# Altium PCB Step_Motor_Driver.PcbDoc
Units mil, origin at the board's own origin, x right, y up, seen from the top; angles counter-clockwise.
Board outline 3200 x 2100 mil, 2 copper layers (Top Layer, Bottom Layer); 30 components, 48 nets, 149 pads, 34 vias.
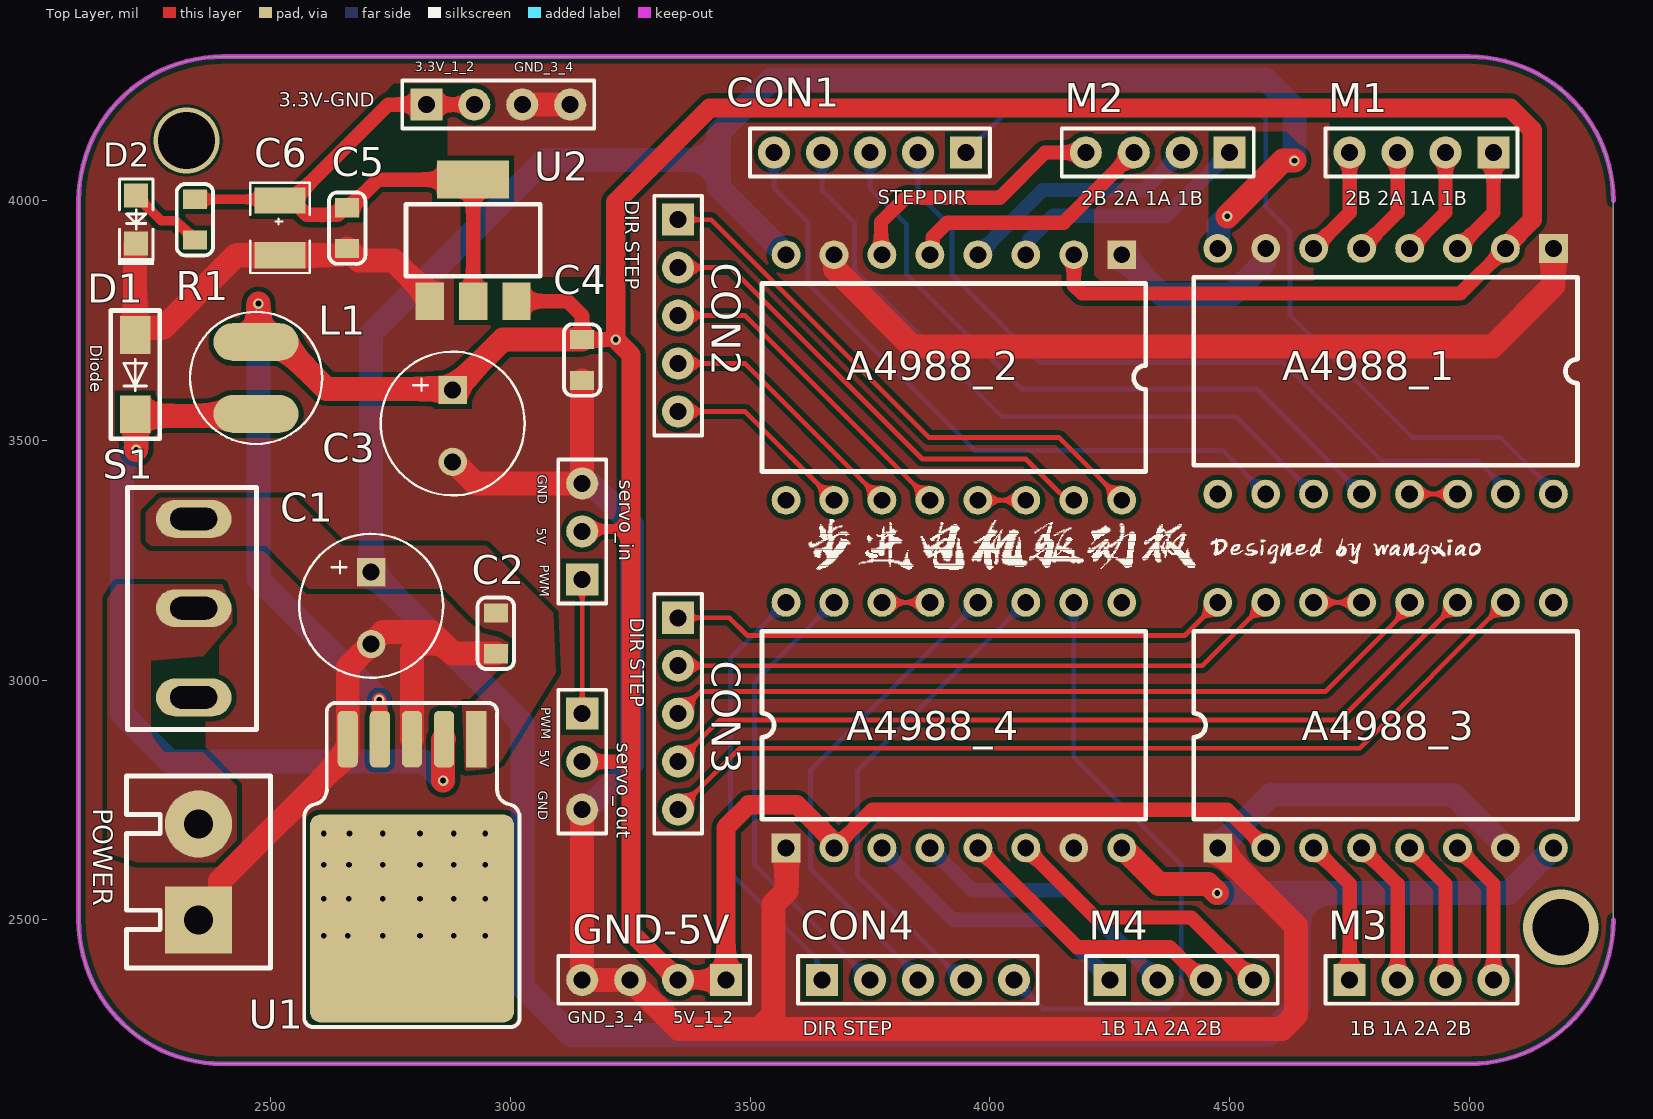
[diagram p0: Top Layer view]
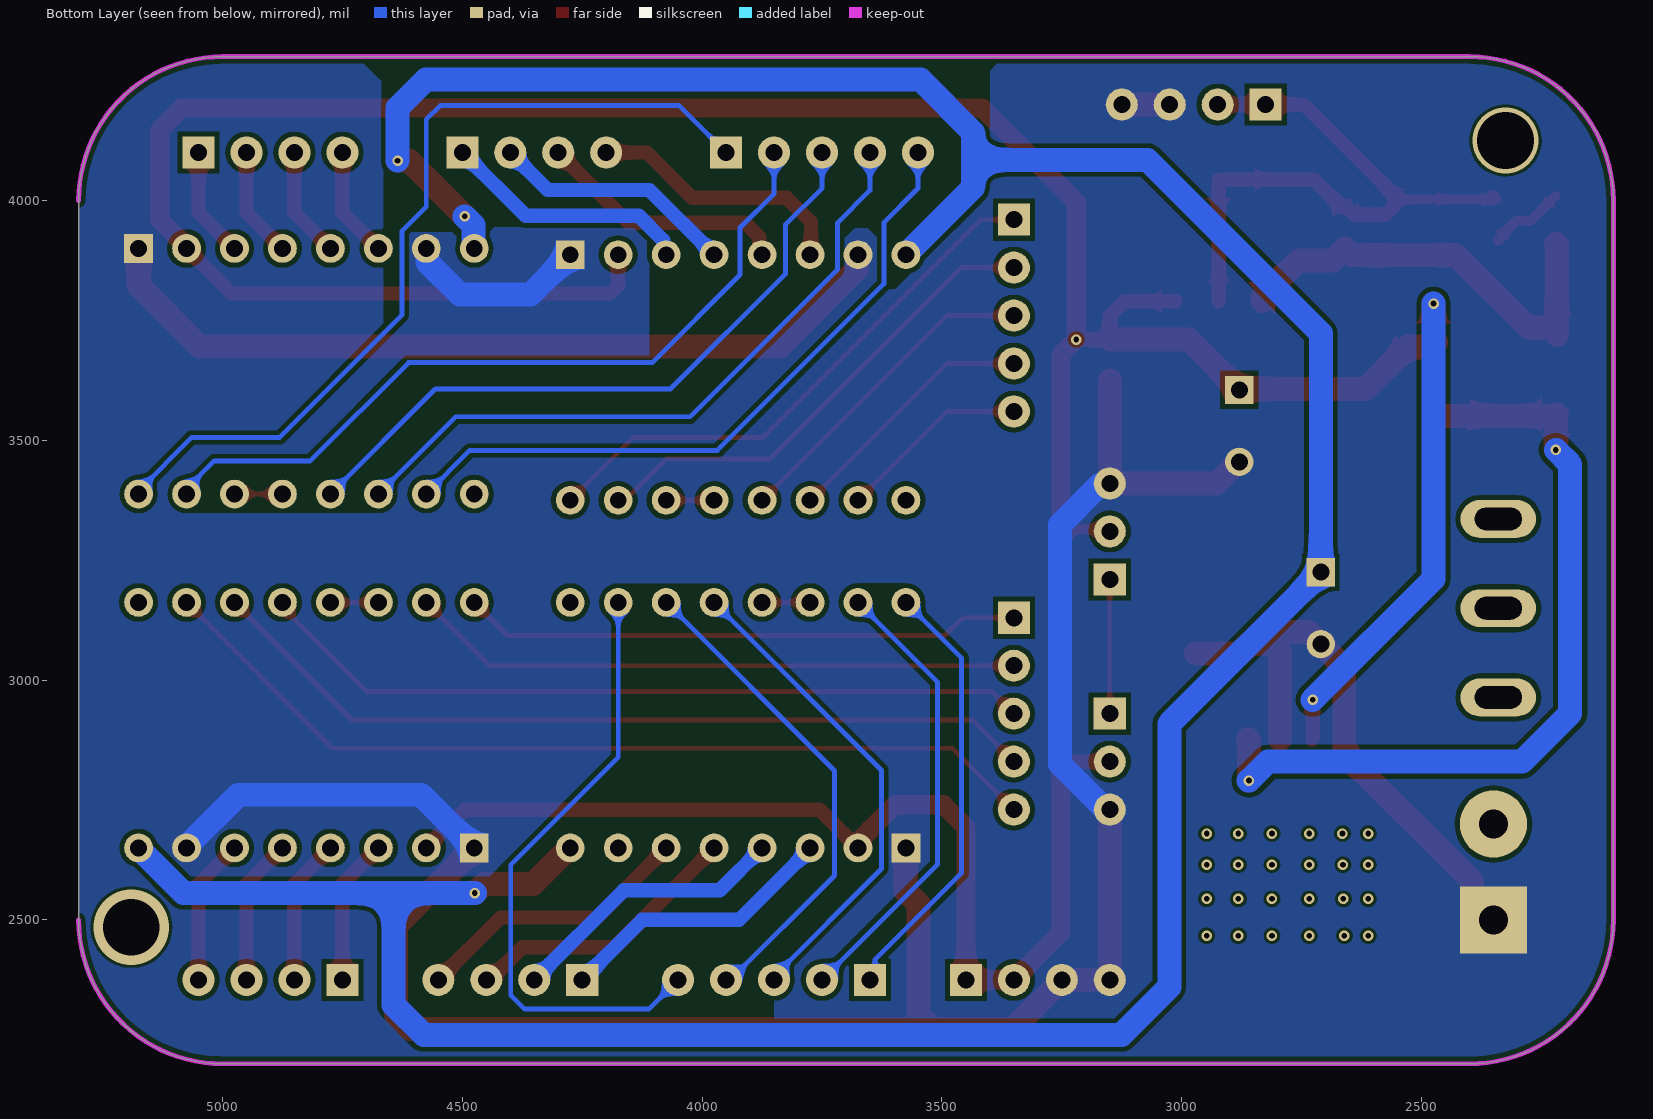
[diagram p1: Bottom Layer view, seen from below]

## Layer stack, top to bottom
Top Solder: solder mask 0.4, Solder Resist, Dk 3.5
Top Layer: signal copper 1.4
Dielectric 1: dielectric 12.6, FR-4, Dk 4.8
Bottom Layer: signal copper 1.4
Bottom Solder: solder mask 0.4, Solder Resist, Dk 3.5

## Board outline
2100,2500 2100,4000 cw(c2400,4000) 2400,4300 5000,4300 cw(c5000,4000) 5300,4000 5300,2500 cw(c5000,2500) 5000,2200 2400,2200 cw(c2400,2500)

## Design rules (kind name [scope] priority, off if disabled: settings)
Clearance [All] p1: gap=6 ignorepadtopadclearanceinfootprint=TRUE except(10: Arc-Fill Arc-Poly Arc-Region Track-Fill Track-Poly Track-Region SMDPad-Fill SMDPad-Poly SMDPad-Region THPad-Fill THPad-Poly THPad-Region Fill-Fill Fill-Poly Fill-Region Poly-Poly Poly-Region Region-Region)
PlaneClearance [All] p1: clearance=8
PolygonConnect [All] p1: connectstyle=Direct reliefconductorwidth=10 reliefentries=4 polygonreliefangle="90 Angle" airgapwidth=10
RoutingVias [All] p1: holewidth=12 width=22 viastyle="Through Hole" minholewidth=12 minwidth=22 maxholewidth=12 maxwidth=22
SilkToSilkClearance [All] p1: silktosilkclearance=6
SilkToSolderMaskClearance [IsPad] p1: minsilkscreentomaskgap=2 clearancetoexposedcopper=TRUE
SolderMaskExpansion [All] p1: expansion=4 istentingtop=FALSE
Width PWR [InNetClass('PWR')] p1: maxlimit=60 minlimit=20 preferedwidth=20
Width [All] p2: maxlimit=20 minlimit=10 preferedwidth=10
27 further rules are at their usual default settings.

## Classes and differential pairs
net class PWR: 1A_1 1A_2 1A_3 1A_4 1B_1 1B_2 1B_3 1B_4 2A_1 2A_2 2A_3 2A_4 2B_1 2B_2 2B_3 2B_4 3.3V 5V 12V GND NetD1_2 NetD2_1

## Components (designator, comment, footprint, x,y, rotation, side; value= is the part's Value field where it differs from the comment)
3.3V-GND "3.3V_GND" HDR2.54-LI-4P 2975,4200 r0 top (schematic designator P3)
A4988_1 "A4988_1" A4988 5175,3900 r270 top (schematic designator U3)
A4988_2 "A4988_2" A4988 4275,3887 r270 top (schematic designator U4)
A4988_3 "A4988_3" A4988 4475,2650 r90 top (schematic designator U5)
A4988_4 "A4988_4" A4988 3575,2650 r90 top (schematic designator U6)
C1 "220uF/25V" "CAP POL [25V]" 2710,3150 r270 top
C2 "Cap" 0805C 2970,3140 r270 top
C3 "220uF/25V" "CAP POL [25V]" 2880,3530 r270 top
C4 "Cap" 0805C 3150,3710 r270 top
C5 "Cap" 0805C 2660,3900 r90 top
C6 "Cap Pol(22uF)" CAP[1210] 2521,3942.91 r270 top
CON1 "CON1" HDR2.54-LI-5P 3750,4100 r180 top (schematic designator P7)
CON2 "CON2" HDR2.54-LI-5P 3350,3760 r270 top (schematic designator P9)
CON3 "CON3" HDR2.54-LI-5P 3350,2930 r270 top (schematic designator P11)
CON4 "CON4" HDR2.54-LI-5P 3850,2375 r0 top (schematic designator P13)
D1 "1N5822" SS34_3D 2218,3637 r270 top
D2 "LED_BLUE" 0805LED1 2220,3960 r270 top
GND-5V "5V_GND" HDR2.54-LI-4P 3300,2375 r180 top (schematic designator P2)
L1 "Inductor" Inductor_T10uH 2470,3630 r90 top
M1 "M1" HDR2.54-LI-4P 4900,4100 r180 top (schematic designator P6)
M2 "M2" HDR2.54-LI-4P 4350,4100 r180 top (schematic designator P8)
M3 "M3" HDR2.54-LI-4P 4900,2375 r0 top (schematic designator P10)
M4 "M4" HDR2.54-LI-4P 4400,2375 r0 top (schematic designator P12)
POWER "power" 电源端子 2350,2605 r90 top (schematic designator P1)
R1 "Res2" 0805R 2342.5,4002.5 r270 top
S1 "SW-SPDT" SW-TO3 2340,3150 r0 top
servo_in "servo" HDR2.54-LI-3P 3150,3310 r90 top (schematic designator P4)
servo_out "servo" HDR2.54-LI-3P 3150,2830 r270 top (schematic designator P5)
U1 "LM2596-5.0" TO-263-5 2795,2690 r180 top
U2 "AMS1117-3.3" SOT-223 2920,3920 r0 top

## Footprints (in the part's own frame and the unit in brackets; to place one, negate y for a bottom-side part, rotate by r counter-clockwise, add the part's x,y. Pads: shape width x height; smd on the part's side, far side on the other; paste and mask are expansions set on the pad)
0805C [mil]
  rect 40x50 smd: 1(0,0) 2(85,0)
  silkscreen extent -32,-38 117,38, body extent 3,-25 82,25, height 30
0805LED1 [mil]
  rect 50x50 smd: 1(-50,0) 2(50,0)
  silkscreen extent -85,-37 94,37, body extent -37,-24 43,25, height 43
0805R [mil]
  rect 40x50 smd: 1(0,0) 2(85,0)
  silkscreen extent -32,-38 117,38, body extent 3,-25 82,25, height 30
A4988 [mil]
  rect 60x60 hole 35: 1(0,0)
  round 60 hole 35: 2(0,-100) 3(0,-200) 4(0,-300) 5(0,-400) 6(0,-500) 7(0,-600) 8(0,-700) 9(512,-700) 10(512,-600) 11(512,-500) 12(512,-400) 13(512,-300) 14(512,-200) 15(512,-100) 16(512,0)
  silkscreen extent 60,-750 452,50
"CAP POL [25V]" [mm]
  rect 1.5x1.5 hole 0.9: 1(-1.905,0)
  round 1.5 hole 0.9: 2(1.905,0)
  silkscreen extent -3.94,-3.81 3.68,3.81, body extent -4,-4 4,4, height 12
CAP[1210] [mm]
  rect 1.402x2.7 smd: 1(-1.45,-0.025) 2(1.45,-0.025)
  silkscreen extent -2.39,-1.6 2.39,1.55
HDR2.54-LI-3P [mm] "排针，3脚"
  rect 1.7x1.7 hole 0.9: 1(-2.54,0)
  round 1.7 hole 0.9: 2(0,0) 3(2.54,0)
  silkscreen extent -3.81,-1.27 3.81,1.27, body extent -3.81,-1.27 3.81,1.27, height 8.5
HDR2.54-LI-4P [mm] "排针，4脚"
  rect 1.7x1.7 hole 0.9: 1(-3.81,0)
  round 1.7 hole 0.9: 2(-1.27,0) 3(1.27,0) 4(3.81,0)
  silkscreen extent -5.08,-1.27 5.08,1.27, body extent -5.08,-1.27 5.08,1.27, height 8.5
HDR2.54-LI-5P [mm] "排针，5脚"
  rect 1.7x1.7 hole 0.9: 1(-5.08,0)
  round 1.7 hole 0.9: 2(-2.54,0) 3(0,0) 4(2.54,0) 5(5.08,0)
  silkscreen extent -6.35,-1.27 6.35,1.27, body extent -6.35,-1.27 6.35,1.27, height 8.5
Inductor_T10uH [mm]
  oval 2x4.5 smd: 1(-1.905,0) 2(1.905,0)
  silkscreen extent -3.5,-3.5 3.5,3.5, body extent -3.5,-3.5 3.5,3.5, height 6.35
SOT-223 [mil]
  rect 59x79 smd: 1(-88,-130) 2(2.55,-130) 3(93.1,-130)
  rect 150x79 smd: 4(1.88,123.54)
  silkscreen extent -137,-78 143,72, body extent -126,-139 130,135, height 67
SS34_3D [mm]
  rect 2x1.6 smd: 1(-2.1,0) 2(2.1,0)
  silkscreen extent -3.4,-1.3 3.4,1.3, body extent -2.46,-1.36 2.54,1.34, height 2.15
SW-TO3 [mm]
  oval 4x2 hole 1.2 slot 2.5 at 0 deg: 1(0,-4.724) 2(0,0) 3(0,4.724)
  silkscreen extent -3.5,-6.43 3.33,6.39, body extent -3.43,-6.36 3.43,6.35, height 28.55
TO-263-5 [mm]
  rrect10% 10.8x11 smd: 0(0,4.75)
  rect 1.07x3 smd: 1(-3.4,-4.75)
  rrect50% 1.07x3 smd: 2(-1.7,-4.75) 3(0,-4.75) 4(1.7,-4.75) 5(3.4,-4.75)
  silkscreen extent -5.7,-6.66 5.7,10.5, body extent -5.14,-4.8 5.09,9.55, height 4.48
电源端子 [mil]
  round 140 hole 60: 1(95,0)
  rect 140x140 hole 60: 2(-105,0)
  silkscreen extent -205,-150 195,150, body extent -202,-148 212,155, height 394

## Part data
3.3V-GND GND-5V M1 M2 M3 M4: library part "Header 4", "4P接插件", BOM名称=4P接插件, 学习资源=www.ooocke.com, 版权归属=源创客
A4988_1 A4988_2 A4988_3 A4988_4: library part A4988, "A4988 Module"
C1 C3: library part "Cap Pol [220uF/35V]", "220uF/35V"
C2 C4 C5: library part Cap_1
CON1 CON2 CON3 CON4: library part "Header 5", "5P接插件", BOM名称=5P接插件, 学习资源=www.ooocke.com, 版权归属=源创客
D1: library part 1N5819_1, "二极管"
L1: library part Inductor_1
POWER: library part POWER, "电源输入"
S1: "SPDT Subminiature Toggle Switch, Right Angle Mounting, Vertical Actuation", ComponentLink1Description="Manufacturer Link", ComponentLink1URL=http://www.apem.com, DatasheetVersion=05-Dec-2000, LatestRevisionDate=17-Dec-2003, LatestRevisionNote="Schematic revised, PCB Footprint replaced.", PackageDescription="Switch; 4 Leads", PackageReference=TL36WW15050, Published=24-Mar-1999, Publisher="Altium Limited"
servo_in servo_out: library part "Header 3", "3P接插件", BOM名称=3P接插件, 学习资源=www.ooocke.com, 版权归属=源创客
U1: "IC"

## Via types
v1: diameter 22, hole 12, Top Layer to Bottom Layer, 24 vias
v2: diameter 22, hole 12, Top Layer to Bottom Layer, tented both sides, 8 vias
v3: diameter 157.48, hole 118.11, Top Layer to Bottom Layer, 1 vias
v4: diameter 137.8, hole 118.11, Top Layer to Bottom Layer, 1 vias

## Nets (pads, with @x,y where several pads share a name; then routed paths per layer and width w, separated by ;. In a path a pad name is that pad's centre, name@x,y a point inside that pad or via, vN(x,y) a via of type N, cw(c..) or ccw(c..) an arc to the next point about the centre after c; other vN are vias at no path point)
1A_1: A4988_1.4 M1.2 | length 231.1
  Top Layer w30: A4988_1.4 4950,3975 M1.2
1A_2: A4988_2.4 M2.2 | length 513.2
  Bottom Layer w30: A4988_2.4 4110,4022 4322,4022 M2.2
1A_3: A4988_3.4 M3.2 | length 306.1
  Top Layer w30: A4988_3.4 4850,2575 M3.2
1A_4: A4988_4.4 M4.2 | length 588.9
  Bottom Layer w30: A4988_4.4 3963,2562 4163,2562 M4.2
1B_1: A4988_1.3 M1.1 | length 231.1
  Top Layer w30: A4988_1.3 5050,3975 M1.1
1B_2: A4988_2.3 M2.1 | length 527.3
  Bottom Layer w30: A4988_2.3 4080.74,3892.74 4080.74,3916.74 4132,3968 4368,3968 M2.1
1B_3: A4988_3.3 M3.1 | length 306.1
  Top Layer w30: A4988_3.3 4750,2575 M3.1
1B_4: A4988_4.3 M4.1 | length 590.1
  Bottom Layer w30: A4988_4.3 3775,2648 3923,2500 4125,2500 M4.1
2A_1: A4988_1.5 M1.3 | length 231.1
  Top Layer w30: A4988_1.5 4850,3975 M1.3
2A_2: A4988_2.5 M2.3 | length 531.4
  Top Layer w30: A4988_2.5 3880.74,3892.74 3880.74,3923.74 3911,3954 4154,3954 M2.3
2A_3: A4988_3.5 M3.3 | length 306.1
  Top Layer w30: A4988_3.5 4950,2575 M3.3
2A_4: A4988_4.5 M4.3 | length 588.9
  Top Layer w30: A4988_4.5 4182,2443 4375,2443 4443,2375 M4.3
2B_1: A4988_1.6 M1.4 | length 231.1
  Top Layer w30: A4988_1.6 4750,3975 M1.4
2B_2: A4988_2.6 M2.4 | length 564
  Top Layer w30: A4988_2.6@3780.74,3892.74 A4988_2.6 3773,3889 3773,3955 3824,4006 4021,4006 4115,4100 M2.4
2B_3: A4988_3.6 M3.4 | length 306.1
  Top Layer w30: A4988_3.6 5050,2575 M3.4
2B_4: A4988_4.6 M4.4 | length 588.9
  Top Layer w30: A4988_4.6 4220,2505 4420,2505 M4.4
3.3V: 3.3V-GND.1 3.3V-GND.2 C5.2 C6.1 R1.1 U2.2 U2.4 | length 1342.9
  Top Layer w20: R1.1 C6.1@2543.06,4002.5
  Top Layer w30: R1.1@2351.5,4006.5 R1.1@2354,4004 ; C6.1@2543.06,4002.5 C6.1@2545.56,4000 ; U2.2 2922.55,4042.87 U2.4 2723.54,4043.54 2665,3985 C5.2 2655,3985 2640,3970 2575.56,3970 C6.1@2545.56,4000 ; 3.3V-GND.2 3.3V-GND.1 2745.56,4200 C6.1@2545.56,4000
5V: A4988_1.2 A4988_2.2 A4988_3.2 A4988_4.2 C3.1 C4.1 GND-5V.1 GND-5V.2 L1.2 servo_in.2 servo_out.2 U1.4 U2.3 | length 8975.8
  Top Layer w20: servo_in.2 3155,3315 3252,3315
  Top Layer w30: v2(2727,2959) 2727,2878.08 U1.4 ; U2.3 3120,3790 3150,3760 C4.1 v2(3220,3710) ; servo_out.2 3252,2830 ; A4988_4.2 3755,2730 4495,2730 A4988_3.2 ; A4988_2.2 4175,3823.57 4192.57,3806 4981,3806 A4988_1.2
  Top Layer w40: A4988_4.2 3675,2655.41 3665,2665.41 3665,2673 3598,2740 3497,2740 3450,2693 GND-5V.1 GND-5V.2 3252,2473 3252,2830 3252,3315 3252,3678 v2(3220,3710) 3220,3997 3416,4193 5085,4193 5131,4147 5131,3960 5075,3904 A4988_1.2
  Top Layer w50: v2(2475,3785) 2475,3710 L1.2 2479.39,3695.61 2528.6,3695.61 2617.21,3607 2878,3607 C3.1 2985,3710 C4.1
  Bottom Layer w50: v2(2475,3785) 2475,3211 v2(2727,2959)
12V: A4988_1.8 A4988_2.8 A4988_3.8 A4988_4.8 C1.1 C2.1 S1.3 U1.1 | length 7220.3
  Top Layer w50: A4988_4.8 4277.71,2650 4352.71,2575 4455,2575 v2(4474,2556) ; v2(4495,3967) 4611,4083 v2(4635,4083)
  Bottom Layer w50: A4988_2.8 3435,4027 3435,4084.5 ; v2(4474,2556) 4643,2556 ; A4988_1.8 4476.91,3901.91 4476.91,3948.91 v2(4495,3967) ; v2(4635,4083) 4635,4193 4576,4252 3545,4252 3435,4142 3435,4084.5 ; A4988_3.8 5081,2556 4643,2556 ; 3435,4084.5 3071.5,4084.5 2710,3723 C1.1 3026,2909 3026,2360 3126,2260 4580,2260 4643,2323 4643,2556
DIR_1: A4988_1.16 CON1.1 | length 1814.3
  Bottom Layer w10: CON1.1 4048,4198 4546,4198 4575,4169 4575,3987 4626,3936 4626,3761 4881,3506 5064,3506 5175,3395 A4988_1.16
DIR_2: A4988_2.16 CON2.1 | length 1167.3
  Top Layer w10: CON2.1 3419,3960 3873,3506 4144,3506 A4988_2.16
DIR_3: A4988_3.16 CON3.1 | length 1168.9
  Top Layer w10: CON3.1 3457,3130 3494,3093 4406,3093 A4988_3.16
DIR_4: A4988_4.16 CON4.1 | length 914.2
  Bottom Layer w10: A4988_4.16 3459,3046 3459,2598 3639.39,2417.61 3639.39,2385.61 CON4.1
GND: 3.3V-GND.3 3.3V-GND.4 A4988_1.1 A4988_1.7 A4988_2.1 A4988_2.7 A4988_3.1 A4988_3.7 A4988_4.1 A4988_4.7 C1.2 C2.2 C3.2 C4.2 C5.1 C6.2 D1.1 D2.2 GND-5V.3 GND-5V.4 POWER.2 servo_in.3 servo_out.3 U1.3 U1.5 U2.1 | length 9095.6
  Top Layer w50: D2.2 2218,3908 D1.1 2224.5,3735.05 2277.05,3735.05 2427.83,3885.83 C6.2 2645.83,3885.83 C5.1 2684.79,3875.21 2756.79,3875.21 2832,3800 U2.1 ; POWER.2 2395,2545 2395,2580.75 2657.21,2842.95 2661.14,2846.89 2661.14,3026.14 C1.2 2735,3100 2835,3100 ; U1.3 2795,3060 2835,3100 ; C3.2@2879,3455 2882.45,3455 2927.45,3410 servo_in.3 C4.2 ; C2.2 2880,3055 2835,3100 ; 3.3V-GND.3 3.3V-GND.4 ; servo_out.3 GND-5V.4 GND-5V.3 3352,2273 3519.71,2273 ; A4988_4.1 3575,2646 3576,2645 3576,2560 3549,2533 3549,2302.29 3519.71,2273 ; A4988_2.7 3676.91,3885.09 3676.91,3857.09 3838,3696 5047.71,3696 5175,3823.29 A4988_1.1 ; A4988_3.1 4638,2487 4638,2302.29 4608.71,2273 3519.71,2273
  Bottom Layer w50: servo_out.3 3154.58,2730 3163.05,2738.46 3167.46,2738.46 3254,2825 3254,3324 3171.24,3406.76 3153.24,3406.76 servo_in.3 ; A4988_2.1 4358,3804 4505,3804 4573.09,3872.09 4573.09,3898.09 A4988_1.7 ; A4988_3.1 4586,2761 4966.71,2761 5075,2652.71 A4988_3.7
MS1_1: A4988_1.10 CON1.5 | length 1438.8
  Bottom Layer w10: CON1.5 3550,4025 3621,3954 3621,3826 3968,3479 4484,3479 A4988_1.10
MS1_2: A4988_2.10 CON2.5 | length 401.6
  Top Layer w10: CON2.5 3490,3560 A4988_2.10
MS1_3: A4988_3.10 CON3.5 | length 1903.9
  Top Layer w10: CON3.5 3478,2858 4771,2858 A4988_3.10
MS1_4: A4988_4.10 CON4.5 | length 1298.1
  Bottom Layer w10: CON4.5 4111,2314 4370,2314 4399,2343 4399,2615 4175,2839 A4988_4.10
MS2_1: A4988_1.11 CON1.4 | length 1423
  Bottom Layer w10: CON1.4 3650,4021 3718,3953 3718,3856 4025,3549 4514,3549 A4988_1.11
MS2_2: A4988_2.11 CON2.4 | length 543.1
  Top Layer w10: CON2.4 3490,3660 A4988_2.11
MS2_3: A4988_3.11 CON3.4 | length 1762.5
  Top Layer w10: CON3.4 3437,2917 4730,2917 A4988_3.11
MS2_4: A4988_4.11 CON4.4 | length 1031.3
  Bottom Layer w10: CON4.4 3941,2375 3724,2592 3724,2811 A4988_4.11
MS3_1: A4988_1.12 CON1.3 | length 1423.6
  Bottom Layer w10: CON1.3 3750,4026 3826,3950 3826,3847 4066,3607 4556,3607 A4988_1.12
MS3_2: A4988_2.12 CON2.3 | length 684.5
  Top Layer w10: CON2.3 3490,3760 A4988_2.12
MS3_3: A4988_3.12 CON3.3 | length 1627
  Top Layer w10: CON3.3 3396,2976 4699,2976 4875,3152 A4988_3.12
MS3_4: A4988_4.12 CON4.3 | length 1024.3
  Bottom Layer w10: CON4.3 3850,2383 3626,2607 3626,2812 3975,3161 A4988_4.12
NetD1_2: D1.2 L1.1 U1.2 | length 1703.2
  Top Layer w50: D1.2 2220,3552.32 D1.2@2220,3551 ; v2(2220,3480) D1.2@2220,3551 ; L1.1@2470,3551 D1.2@2220,3551 ; v2(2860,2790.48) 2860,2875.08 U1.2
  Bottom Layer w50: v2(2220,3480) 2190,3450 2190,2930 2290,2830 2820,2830 2859.52,2790.48 v2(2860,2790.48) v2@2860.48,2790.48
NetD2_1: D2.1 R1.2 | length 163.7
  Top Layer w20: D2.1 2272,3958 2302,3958 2327.5,3932.5 2327.5,3927.5 2337.5,3917.5 R1.2
NetP1_1: POWER.1 S1.2
NetU3_13: A4988_1.13 A4988_1.14 | length 100
  Top Layer w10: A4988_1.13 A4988_1.14
NetU4_13: A4988_2.13 A4988_2.14 | length 100
  Top Layer w10: A4988_2.13 A4988_2.14
NetU5_13: A4988_3.13 A4988_3.14 | length 100
  Top Layer w10: A4988_3.14 A4988_3.13
NetU6_13: A4988_4.13 A4988_4.14 | length 100
  Top Layer w10: A4988_4.14 A4988_4.13
PWM: servo_in.1 servo_out.1 | length 280
  Top Layer w10: servo_out.1 servo_in.1
STEP_1: A4988_1.15 CON1.2 | length 1634.1
  Bottom Layer w10: CON1.2 3850,4014 3921,3943 3921,3845 4104,3662 4612,3662 4817,3457 5017,3457 5075,3399 A4988_1.15
STEP_2: A4988_2.15 CON2.2 | length 1025.9
  Top Layer w10: CON2.2 3460,3860 3859,3461 4075,3461 4146.18,3389.82 4146.65,3389.82 4161.47,3375 A4988_2.15
STEP_3: A4988_3.15 CON3.2 | length 1279.7
  Top Layer w10: CON3.2 4443,3030 A4988_3.15
STEP_4: A4988_4.15 CON4.2 | length 955.6
  Bottom Layer w10: A4988_4.15 3602.29,3089.29 3509,2996 3509,2616 CON4.2
pads on no net: A4988_1.9 A4988_2.9 A4988_3.9 A4988_4.9 S1.1 U1.0
copper on no net:
  other v1: 2611,2467 2661,2467 2734,2467 2812,2467 2882,2467 2948,2467 2611,2544 2663,2544 2734,2544 2812,2544 2882,2544 2948,2544 2611,2615 2664,2615 2734,2615 2812,2615 2882,2615 2948,2615 2611,2680 2665,2680 2734,2680 2812,2680 2882,2680 2948,2680
  other v3: 5190,2485
  other v4: 2325,4125

## Polygon pours and split planes (outlines as drawn)
GND on Top Layer "GND_L01_P007" (solid, remove dead copper, pour order 7): 2100,4300 5300,4300 5300,2200 2100,2200
12V on Top Layer "12V_L01_P002" (solid, remove dead copper, pour order 2): 2270,3380 2550,3380 2650,3280 2950,3280 3040,3190 3040,3120 3030,3110 2945.57,3108.61 2920,3130 2860,3190 2580,3190 2490,3280 2250,3280 2240,3290 2240,3350
12V on Top Layer "12V_L01_P003" (solid, remove dead copper, pour order 3): 3040,3190 3090,3140 3095,3015 2980,2830 2955,2815 2905,2810 2900,2950 2920,2950 2980,3010 3005,3025 3008,3084 2982.35,3099.41 2940,3110
NetP1_1 on Top Layer "NETP1_1_L01_P001" (solid, remove dead copper, pour order 1): 2220,2620 2400,2620 2430,2650 2430,2780 2360,2850 2280,2850 2270,2860 2250,2890 2250,3040 2360,3050 2420,3120 2420,3147.5 2400,3200 2180,3200 2160,3170 2160,3150 2160,2640
GND on Bottom Layer "GND_L02_P008" (solid, remove dead copper, pour order 8): 2100,4300 5300,4300 5300,2200 2100,2200

## Keep-outs
Keep-Out Layer:
  lines w10: 4998.43,2200 2400,2200 cw(c2400,2500) 2100,2500 2100,4000 cw(c2400,4000) 2400,4300 4998.43,4300 ; 5000,2200 ccw(c5000,2500) 5300,2500 ; 5000,4300 cw(c5000,4000) 5300,4000

## Other copper
Top Layer:
  pour cut-out: 4675,3859.65 4675,3831 4735,3831 4737,3833
  pour cut-out: 4933,3831.49 4932.51,3831 4709,3831 4709,4162 4731,4184 5067,4184 5067,3997 5090,3974
  pour cut-out: 4933,3872.77 4933,3907.41 4936.03,3910.44 4940.06,3906.41 4940.06,3879.83
  pour cut-out: 4940.06,3879.83 4933,3872.77 4933,3825 5023,3825 5027,3821 5027,3875
  pour cut-out: 4221.92,4137.97 4278.08,4137.97 4254,4113.89 4254,4071 4232,4071 4229,4068
  pour cut-out: 5006.54,4143.46 5007,4143.93 5007,4167
  pour cut-out: 4456.54,4056.54 4456.54,3936.65 4470.89,3951 4515,3951 4515,4036 4537,4058
  pour cut-out: 4543.46,4143.46 4617.77,4143.46 4644.14,4117.1 4585.04,4058 4537,4058
  pour cut-out: 4203.13,3966.87 4203.13,3858.17 4216.72,3844.58 4216.72,3980.72 4217,3981
  pour cut-out: 4203.13,3858.17 4230.3,3831 4203.62,3831 4203.13,3831.49
  pour cut-out: 4203.13,3831.49 4203.13,3966.87 4203,3967 4166.92,3930.92 4165.07,3930.92 4165.07,3920.07 4165,3920
  pour cut-out: 3775,3846.65 4166.37,3846.65 4175,3855.29 4161.09,3869.2 4161.09,3995.91 4152,4005 4143,3996 3790,3996
  pour cut-out: 2868.46,4243.46 2884.1,4243.46 2874.83,4234.19 2870.67,4234.19 2868.46,4236.4
  pour cut-out: 2868.46,4243.46 2868.46,4229.33 2869.22,4228.58 2884.48,4243.84 2918.84,4243.84 2894,4219 2872,4219
  pour cut-out: 2735.8,4223.55 2737.55,4223.55 2758,4244 2758.54,4243.46 2781.54,4243.46 2781.54,4229.3 2777.96,4225.72 2771.21,4225.72
  pour cut-out: 2260.2,2927.82 2263.32,2927.82 2264.93,2929.42 2279.36,2915 2364,2915 2364,2859.52 2363.9,2859.42 2363.13,2860.2 2274.8,2860.2 2258,2877 2258,2906
  pour cut-out: 2260.2,3030.69 2260.2,3000.18 2261.8,2998.58 2267.18,2998.58 2280.71,3012.1 2392.26,3012.1 2392.26,3079.4 2362.86,3050 2360,3050
  pour cut-out: 3052.6,3839.5 3053.1,3840 3189,3840 3189,3741.37 3189.74,3740.63 3189.74,3740.62 3176.38,3740.62 3168,3749 3173.55,3754.55 3173.55,3769.76 3170.24,3769.76 3124.51,3815.49 3056.61,3815.49 3052.6,3819.49
  pour cut-out: 2962.05,3839.5 2973.6,3839.5 2973.6,3743.16 2969.85,3743.16 2966.96,3740.27 2964.59,3740.27 2962.05,3742.81
  pour cut-out: 2836.88,4156.54 2868.46,4156.54 2868.46,4094.46 2868,4094 2868,4089 2840.93,4089 2836.88,4093.04
  pour cut-out: 2583.96,3999.6 2583.96,3998.62 2587.1,3995.49 2590.19,3998.58 2625.4,3998.58 2643.04,4016.22 2662.92,4016.22 2715.96,4069.27 2833.31,4069.27 2836.88,4072.84 2836.88,4159.12 2835,4161 2789,4161 2789,4163.2 2770.2,4182 2758,4182 2743,4167
Bottom Layer:
  pour cut-out: 4512.22,3934.29 4512,3934.08 4512,3925 4526,3939
  pour cut-out: 4442,3936 4431,3947 4439.06,3947 4441.61,3944.45
  pour cut-out: 3385,4285 3400,4270 3400,4280 3405,4285
  pour cut-out: 3400.9,4151.14 3399,4153.04 3399,4285 3547,4285 3553,4291
  pour cut-out: 3536.39,3875.68 3596.89,3815.19 3610.19,3815.19 3610.19,3861.81 3610,3862
  pour cut-out: 3753,3852 3958,3852 4091,3719 4091,3675 4100,3675 4123,3652 4620,3652 4620,3641 4806,3455 5015,3455 5017,3457 5075,3399 5075,3347.65 4675,3347.65 4675,3407 4522,3560 4027,3560 4017,3550 3743,3824 3743,3849
  pour cut-out: 4110.33,3677.29 4110.33,3872.92 4099.41,3862 3918,3862
  pour cut-out: 3654,3941 3655,3942 3682,3942 3682,3952 3691,3961 3684,3968 3651,3968
  pour cut-out: 3637,3924 3654,3941 3654,3947 3649,3947 3634,3962
  pour cut-out: 3702,3922 3682,3942 3682,3947 3697,3947 3712,3962
  pour cut-out: 4113.97,3876.56 4115,3877.59 4115,3940 4095,3940 4087,3932
  pour cut-out: 4610.71,3929.67 4606.08,3934.29 4512.22,3934.29 4512.22,3984.22 4553,4025
  pour cut-out: 3947.51,3846.65 4075,3846.65 4075,3964 4013,4026
  pour cut-out: 3970,4204 3974,4208 4566,4208 4566,3978 4532.45,3944.45 3961.45,3944.45 3942,3925
  pour cut-out: 3562.06,4216.7 3906.54,4216.7 3906.54,4143.46 3993.46,4056.54 3975,4038.07 3975,3846.65 3766.65,3846.65 3747,3827 3712,3862 3712,3947 3565,3947 3547,3965
  pour cut-out: 3906.54,4143.46 3906.54,4222.46 3907,4222 4028,4222 4028,4171 3994,4137
  pour cut-out: 3974.28,4145.91 3974.28,4221.28 3976,4223 3977,4222 4079,4222
  pour cut-out: 4259,4074.08 4259,4070 4239,4050 4240,4049 4271,4049
  pour cut-out: 4669.1,4248.12 4669.12,4248.12 4706,4285 4703,4288 4649,4288
  pour cut-out: 4669.1,4202.14 4669.1,4294.1 4670,4295 4581,4295
  pour cut-out: 4664.56,3942.76 4664.56,3733.44 4626,3772 4626,3848.5
  pour cut-out: 4669.1,4073.86 4664.56,4069.32 4664.56,3861.03 4635.03,3861.03 4633,3859 4618,3874 4618,3958 4574,4002 4576,4004 4576,4060
  pour cut-out: 4548,4226 4584,4190 4616,4190 4616,4066.7 4634.7,4048 4586,4048 4586,4158 4575,4169
  pour cut-out: 4256.16,4100 4259,4097.16 4259,4051 4320,4051 4331,4062
  pour cut-out: 4300,4143.84 4400,4143.84 4400,4100 4350,4050
  pour cut-out: 4456.54,4143.46 4456.16,4143.84 4400,4143.84 4400,4111 4436,4075 4452,4075 4452,4091.48 4456.54,4096.01
  pour cut-out: 3559.62,4216.7 3561.35,4214.97 3561.35,4142.35 3478.65,4142.35 3477.16,4143.84
  pour cut-out: 3612,3908 3613,3909 3613,3959 3600.71,3959 3534.71,4025 3550,4040.29 3550,4143.84 3477.16,4143.84 3469,4152 3421,4104 3421,4044 3447,4044 3590,3901
  pour cut-out: 4413.13,2620.85 4413.15,2620.85 4447,2587 4422,2562 4407,2562
  pour cut-out: 4363,2293 4563.08,2293 4607.7,2337.62 4607.7,2501.81 4518.51,2591 4414,2591
  pour cut-out: 3975,3202.35 4175,3202.35 4125.65,3153 4033,3153
  pour cut-out: 3575,3202.35 3675,3202.35 3643.65,3171 3621,3171
  pour cut-out: 3678.37,2418.46 3678.37,2421.17 3680.29,2423.08 3494.87,2608.5 3494.87,3003.77 3646.47,3155.37 3646.47,3190.53 3601.58,3190.53 3595.17,3196.94 3456,3057.77 3456,2601 3638.54,2418.46
  pour cut-out: 3850,2331.16 3850,2293 3851,2292 3852,2293 3901,2293 3901,2355
  pour cut-out: 3641.29,2620.44 3707.44,2620.44 3718,2631 3924,2425 3924,2306 3896,2306 3885,2295 3879,2301 3879,2364
  pour cut-out: 3646.03,2677.95 3708.05,2677.95 3714,2672 4046.47,3004.47 4046.47,3190.53 4003.53,3190.53 3631,2818 3631,2666
  pour cut-out: 4085.44,3200.97 4089.47,3196.94 4154.83,3196.94 4154.83,3122.17 4172,3105 4078,3105
  pour cut-out: 4058.45,3120.4 3742.71,2804.67 3739.29,2804.67 3739.29,2653.29 3739,2653 3988,2404 4395,2404 4395,2611 4399,2615 4175,2839 4175,3100.62 4159.51,3116.11
  pour cut-out: 3741.1,2679.22 3741.79,2678.53 3846.47,2678.53 3846.47,2673.47 3808,2635
  pour cut-out: 3885,2295 3901,2311 3901,2304.5 3912.5,2293
  pour cut-out: 3900.96,2311.04 3901,2311 3901,2293 3924,2293 3925,2294
  pour cut-out: 3742,2635 3874,2635 4126,2383 4272,2383 4272,2362 4213,2303 4200,2316 4128,2316 4128,2299 4131,2296 4130.3,2295.3 3917.3,2295.3 3917,2295 3900.96,2311.04 3900.96,2422.04 3826,2497
  pour cut-out: 3739.29,2677.39 3743.68,2673 3854,2673 3981,2546 4179,2546 4300,2425 4278,2403 4213,2403 4104,2512 3927,2512

## Silkscreen, mask and mechanical layers (free items; w line width, h text height)
Top Overlay:
  drawing of 1675 lines, arcs and shapes, not listed
  text "3.3V_1_2" at 2801,4269.33 h20
  text "GND_3_4" at 3008,4268.33 h20
  text "DIR STEP" at 3240,4000 h30 r270
  text "STEP DIR" at 3765.94,3992.26 h30
  text "2B 2A 1A 1B" at 4190,3990 h30
  text "2B 2A 1A 1B" at 4741.32,3990 h30
  text "Diode" at 2124,3699 h25 r270
  text "GND" at 3057,3428 h20 r270
  text "5V" at 3055,3318 h20 r270
  text "PWM" at 3061,3241 h20 r270
  text "DIR STEP" at 3250,3130 h30 r270
  text "PWM" at 3065,2943 h20 r270
  text "5V" at 3061,2855 h20 r270
  text "GND" at 3058,2769 h20 r270
  text "GND_3_4" at 3120,2284.17 h25
  text "5V_1_2" at 3340,2284.17 h25
  text "DIR STEP" at 3610,2260 h30
  text "1B 1A 2A 2B" at 4230,2260 h30
  text "1B 1A 2A 2B" at 4750,2260 h30
Mechanical 1:
  lines w10: 4998.43,2200 2400,2200 cw(c2400,2500) 2100,2500 2100,4000 cw(c2400,4000) 2400,4300 4998.43,4300 ; 5000,2200 ccw(c5000,2500) 5300,2500 5300,4000 ccw(c5000,4000) 5000,4300

## Dimensions
2100,4000 to 5300,4000 on Mechanical 1
4998.43,4300 to 4998.43,2200 on Mechanical 1